# EAGLE board lights (EAGLE 5.11)
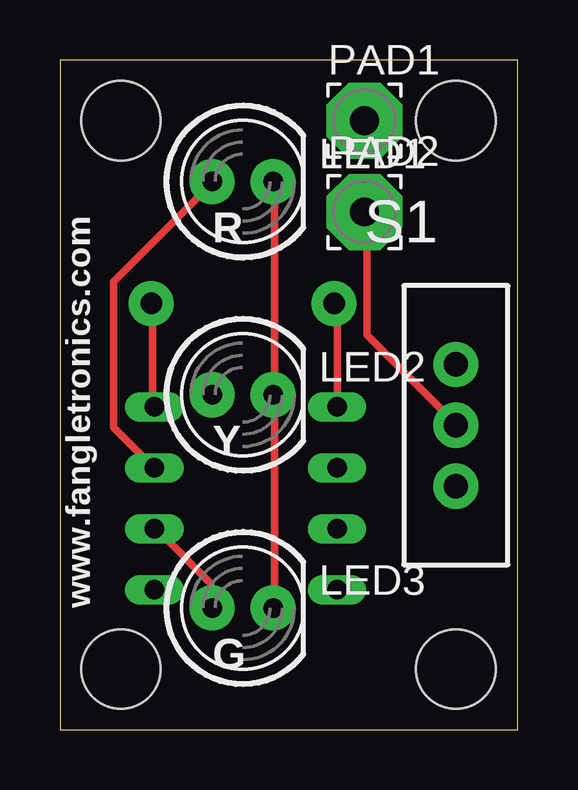
[diagram p0: board, top side]
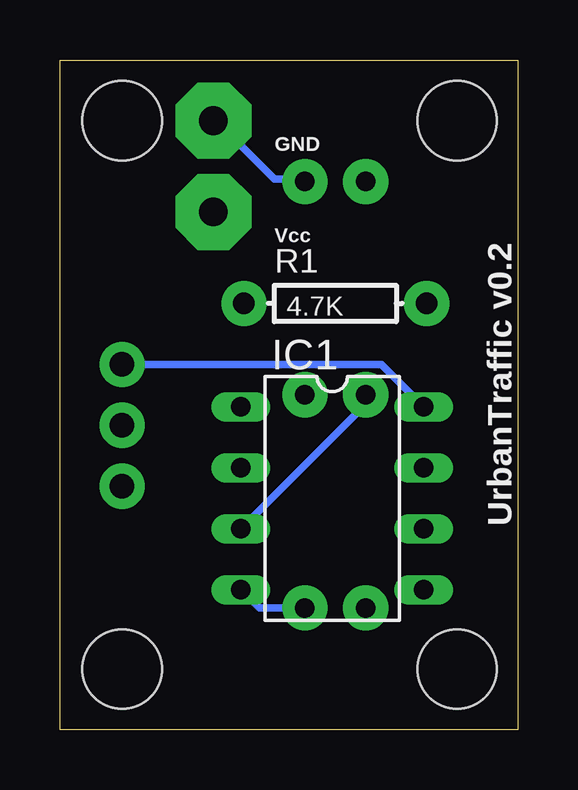
[diagram p1: board, bottom side, seen from below]

Size 19.1 x 27.93 mm. Coordinates in mm from the lower left corner, seen from the top.
Outline: 0,0 19.1,0 19.1,27.93 0,27.93 0,0
Copper layers (1*16): Top 0.0356mm / dielectric 1.5011mm / Bottom 0.0356mm
Design rules "LaenPCBOrder": minimum track width 6mil, minimum drill 13mil, track to track 6mil, track to pad 6mil, pad to pad 6mil, via to via 6mil, smd to smd 6mil, copper to edge 15mil, drill to drill 6mil, minimum pad ring 7mil, minimum via ring 7mil, stop-mask expansion 4mil, vias tented up to drill 0mil, thermal gap 10mil
Net classes: 0 default: width 0.305 mm

## Footprints (pad centres in the part's own frame; a part is rotated, then mirrored left to right if it is on the bottom)
DIL08 = drill 0.813 long: 1 -3.81,-3.81; 2 -1.27,-3.81; 3 1.27,-3.81; 4 3.81,-3.81; 5 3.81,3.81; 6 1.27,3.81; 7 -1.27,3.81; 8 -3.81,3.81
STAND-OFF = hole 3.302: 0,0
LED5MM = drill 0.813 pad 1.88 round: A -1.27,0; K 1.27,0
3,17/1,2 = drill 1.194 pad 3.175 octagon: 1 0,0
AXIAL-0.3 = drill 0.9 pad 1.88 round: P$1 -3.81,0; P$2 3.81,0
SWITCH-SPDT = drill 1.016 pad 1.88 round: 1 0,2.54; 2 0,0; 3 0,-2.54

## Placement (x,y rotation side)
IC1  TINY13-20PU  [DIL08]  7.75,9.65 270 bottom
JP1  STAND-OFF  [STAND-OFF]  2.54,25.4 0 top
JP2  STAND-OFF  [STAND-OFF]  2.54,2.54 0 top
JP3  STAND-OFF  [STAND-OFF]  16.51,2.54 0 top
JP4  STAND-OFF  [STAND-OFF]  16.51,25.4 0 top
LED1  [LED5MM]  7.62,22.86 0 top
LED2  [LED5MM]  7.62,13.97 0 top
LED3  [LED5MM]  7.62,5.08 0 top
PAD1  WIREPAD3,17/1,2  [3,17/1,2]  12.7,25.4 0 top
PAD2  WIREPAD3,17/1,2  [3,17/1,2]  12.7,21.59 0 top
R1  4.7K  [AXIAL-0.3]  7.62,17.78 0 bottom
S1  [SWITCH-SPDT]  16.51,12.7 0 top

## Library data of the parts
IC1 = atmel; MPN: ATTINY13-20PU; OC_FARNELL: 9171550; OC_NEWARK: 96K6521
JP1-JP4 LED1-LED3 S1 = SparkFun
PAD1 PAD2 = wirepad
R1 = Blank_Shield

## Nets
GND: IC1.4 LED1.K LED2.K LED3.K PAD1.1
N$1: IC1.6 LED3.A
N$2: IC1.7 LED1.A
N$3: IC1.3 LED2.A
N$4: IC1.1 R1.P$1
N$5: IC1.8 R1.P$2 S1.1
VCC: PAD2.1 S1.2

## Tracks (layer width: path | path; a pad name or v marks a point on that pad's centre or on a via)
GND
  Top 0.305: LED1.K 8.94,22.76 8.94,14.02 LED2.K 8.94,13.82 8.94,5.08 LED3.K
  Bottom 0.305: IC1.4 11.38,5.69 10.77,5.08 LED3.K | PAD1.1 12.6,25.4 10.16,22.96 8.94,22.96 LED1.K
N$1
  Top 0.305: IC1.6 4.06,8.33 6.3,6.1 6.3,5.08 LED3.A
N$2
  Top 0.305: IC1.7 3.86,10.97 2.23,12.6 2.23,18.69 6.3,22.76 LED1.A
N$3
  Bottom 0.305: IC1.3 11.38,8.53 6.5,13.41 6.5,13.82 LED2.A
N$4
  Top 0.305: IC1.1 11.58,13.61 11.58,17.68 R1.P$1
N$5
  Top 0.305: IC1.8 3.86,13.61 3.86,17.68 R1.P$2
  Bottom 0.305: S1.1 5.69,15.24 4.06,13.61 IC1.8
VCC
  Top 0.305: S1.2 16.46,12.8 12.8,16.46 12.8,21.54 PAD2.1

## Text on the board
tPlace: R | Y | www.fangletronics.com | G
bPlace: GND | UrbanTraffic v0.2 | Vcc